# Altium PCB crossBarAdDaPCB1.PcbDoc (part 2 of 2)
Units mm, origin at the board's own origin, x right, y up, seen from the top; angles counter-clockwise.
Board outline 152.4 x 111.9 mm, 6 copper layers (Top Layer, Mid-Layer 1, Internal Plane 1, Internal Plane 2, Mid-Layer 2, Bottom Layer); 114 components, 142 nets, 664 pads, 264 vias.
Unrouted connection lines stored in the file: 16.
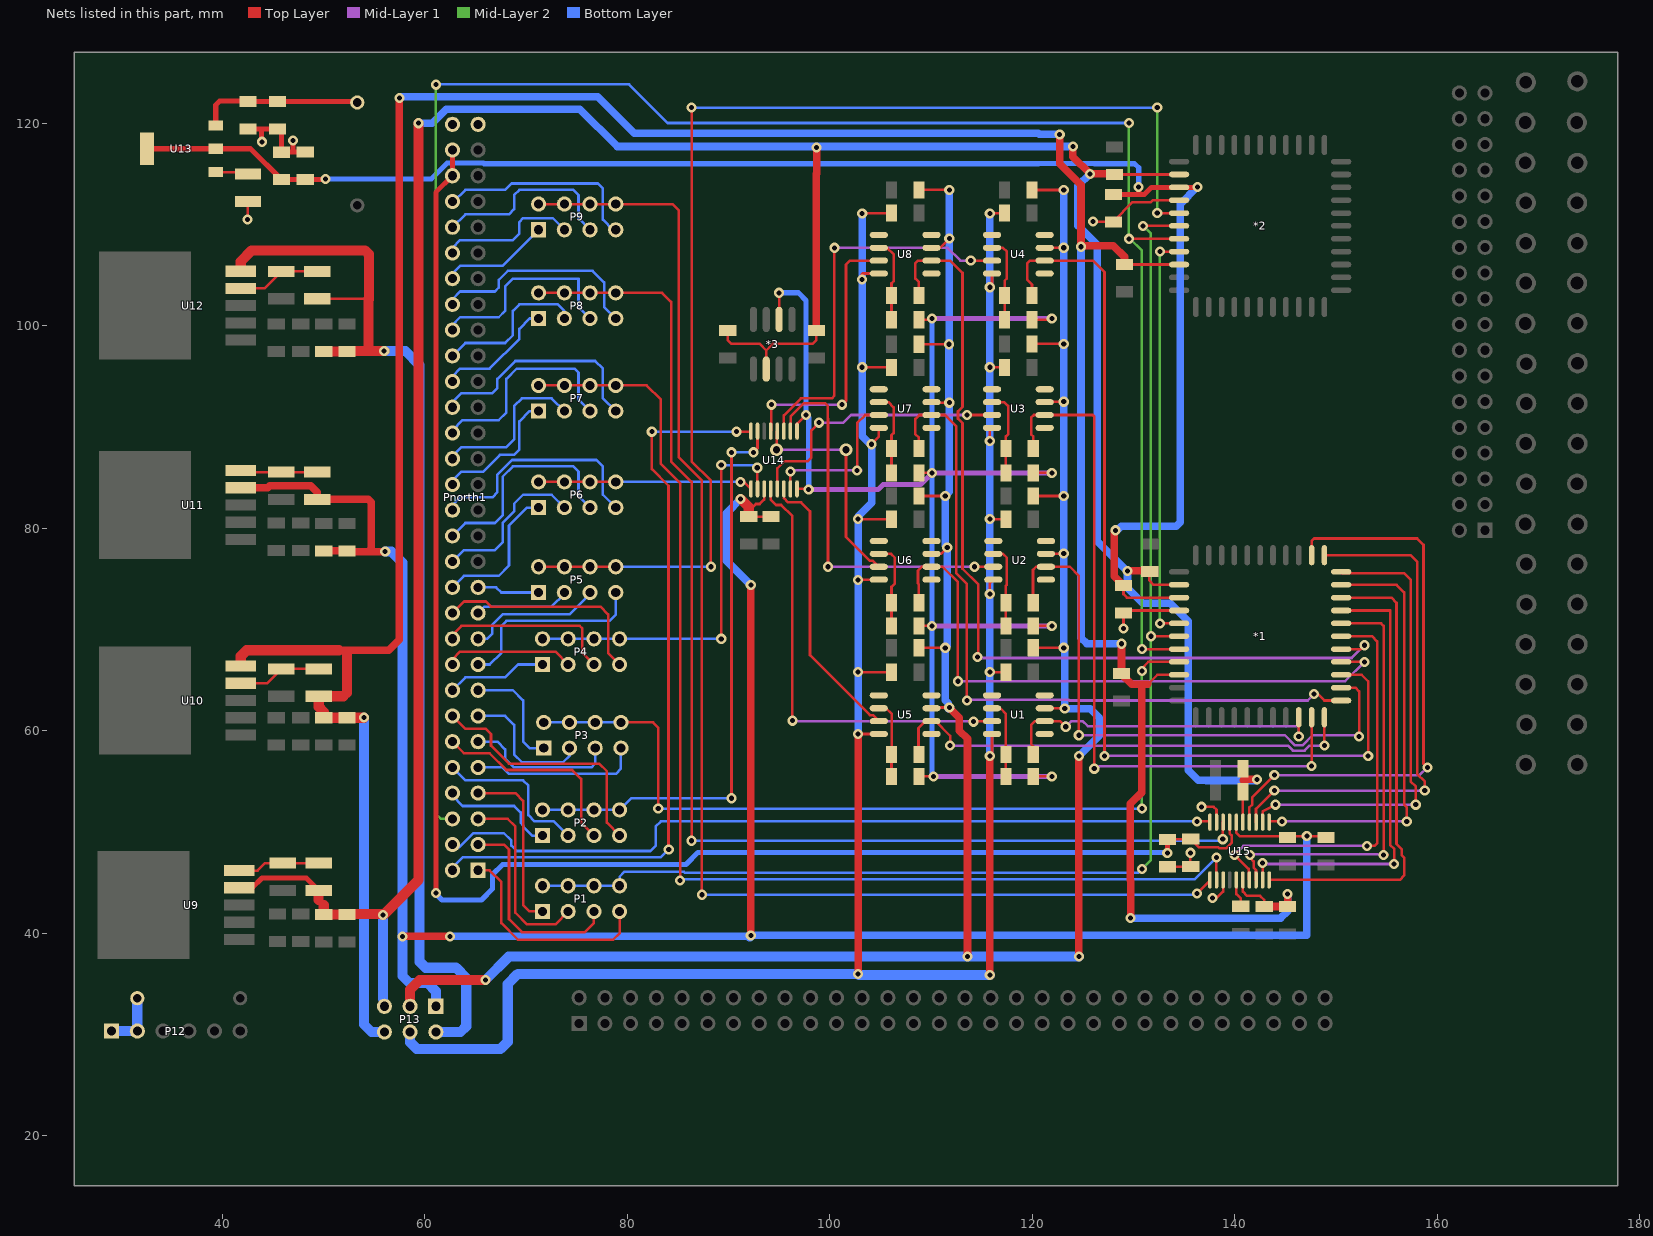
[diagram p6: the nets of this part, all layers, seen from the top]

## Via types
v1: diameter 1, hole 0.5, Top Layer to Bottom Layer, 262 vias
v2: diameter 1.27, hole 0.711, Top Layer to Bottom Layer, 2 vias

## Nets (pads, with @x,y where several pads share a name; then routed paths per layer and width w, separated by ;. In a path a pad name is that pad's centre, name@x,y a point inside that pad or via, vN(x,y) a via of type N, cw(c..) or ccw(c..) an arc to the next point about the centre after c; other vN are vias at no path point) (continued)
GND: *1.43 *2.43 C29.1 C30.1 C45.1 C46.1 C51.2 C52.2 C53.2 C54.2 Pnorth1.59 Pnorth1.60 R27.1 U15.3 U15.19 | length 38
  Top Layer w0.254: v1(42.5,110.5) 42.545,110.545 R27.1@42.545,112.268 ; C51.2@45.466,119.427 C51.2@45.847,119.046 ; C53.2@45.847,117.127 C53.2@45.87,117.15 ; v1(126,110.3) 125.7,110.3 125.75,110.25 C29.1@128,110.25 128,110.3 129.9,112.2 131.7,112.2 131.895,112.395 *2.43@134.494,112.395 ; v1(129,70.1) C30.1@129,71.65 129.232,71.882 *1.43@134.494,71.882 ; C46.1@133.35,46.576 135.603,46.576 135.603,47.948 v1(135.611,47.955) ; v1(136.7,52.5) 137.9,52.5 138.187,52.213 U15.19@138.187,50.983 ; v1(137.8,43.5) 138.2,43.5 138.837,44.137 U15.3@138.837,45.283
  Top Layer w0.508: C52.2@42.545,119.427 43.9,119.427 ; v1@43.9,118.186 43.9,119.427 ; C51.2@45.466,119.427 43.9,119.427 ; C53.2@45.847,117.127 C51.2@45.847,119.046 ; C53.2@45.87,117.15 47,117.15 ; v1(47,118.3) 47,117.15 ; C54.2@48.2,117.15 47,117.15
  other v1: 43.917,118.161
Net*1_15: *1.15 R1.2 U1.6 | length 33.2
  Top Layer w0.254: R1.2@120.095,57.658 120.095,58.467 119.888,58.674 119.888,60.579 120.269,60.96 U1.6@121.218,60.96 122.74,60.96 v1(123.3,60.4) ; v1(146.304,59.436) *1.15@146.304,61.342
  Mid-Layer 1 w0.254: v1@123.3,60.85 123.525,60.625 123.86,60.96 124.968,60.96 125.476,60.452 146.304,60.452 146.304,60.325 v1(146.304,59.436)
Net*1_16: *1.16 R5.2 U3.6 | length 70.4
  Top Layer w0.254: R5.2@120.095,87.884 120.095,89.074 119.888,89.281 119.888,90.932 120.142,91.186 U3.6@121.218,91.186 125.984,91.186 126.111,91.059 v1(126.111,56.261) ; v1(147.574,56.515) *1.16@147.574,61.342
  Mid-Layer 1 w0.254: v1(126.111,56.261) 126.357,56.507 v1@147.312,56.507
Net*1_17: *1.17 R9.2 U5.6 | length 47.8
  Top Layer w0.254: R9.2@108.792,57.658 108.761,57.689 108.761,60.276 109.445,60.96 U5.6@110.042,60.96 110.44,60.96 111.887,59.513 v1(111.887,58.547) ; v1(148.844,58.547) *1.17@148.844,61.342
  Mid-Layer 1 w0.254: v1(111.887,58.547) 145.229,58.547 145.729,58.047 146.879,58.047 147.379,58.547 v1(148.844,58.547)
Net*1_18: *1.18 R13.2 U7.6 | length 72.8
  Top Layer w0.254: R13.2@108.792,87.884 108.792,88.947 108.458,89.281 108.458,90.805 108.839,91.186 U7.6@110.042,91.186 111.379,91.186 112.5,90.065 112.5,75.543 113.538,74.505 v1(113.538,62.992) ; v1(147.828,63.627) 148.209,63.627 148.844,62.992 *1.18@150.494,62.992
  Mid-Layer 1 w0.254: v1(113.538,62.992) 113.627,63.081 123.565,63.081 123.654,62.992 147.193,62.992 v1(147.828,63.627)
Net*1_19: *1.19 R2.2 U2.6 | length 59
  Top Layer w0.254: R2.2@120.095,72.644 120.064,72.675 120.064,75.897 120.367,76.2 U2.6@121.345,76.2 123.698,76.2 124.587,75.311 v1(124.587,59.563) ; *1.19@150.494,64.262 151.892,64.262 152.273,63.881 v1(152.273,59.436)
  Mid-Layer 1 w0.254: v1(124.587,59.563) 144.931,59.563 145.939,58.555 146.669,58.555 147.677,59.563 152.146,59.563 v1(152.273,59.436)
Net*1_20: *1.20 R6.2 U4.6 | length 95.6
  Top Layer w0.254: R6.2@119.968,102.997 119.968,104.06 119.507,104.521 119.507,106.172 119.761,106.426 U4.6@121.218,106.426 125.984,106.426 127.127,105.283 v1(127.127,57.531) ; *1.20@150.494,65.532 152.527,65.532 153.162,64.897 v1(153.162,57.531)
  Mid-Layer 1 w0.254: v1(127.127,57.531) v1(153.162,57.531)
Net*1_21: *1.21 R10.2 U6.6 | length 60.9
  Top Layer w0.254: R10.2@108.792,72.644 108.792,74.469 108.712,74.549 108.712,75.819 109.093,76.2 U6.6@110.042,76.2 111.125,76.2 112.649,74.676 v1(112.649,64.897) ; *1.21@150.494,66.802 v1(152.781,66.802)
  Mid-Layer 1 w0.254: v1(112.649,64.897) 150.876,64.897 v1(152.781,66.802)
Net*1_22: *1.22 R14.2 U8.6 | length 88.8
  Top Layer w0.254: R14.2@108.792,102.997 108.792,104.314 108.458,104.648 108.458,106.172 108.712,106.426 U8.6@110.042,106.426 111.887,106.426 113.1,105.213 113.1,91.994 112.657,91.551 112.657,90.821 113.1,90.378 113.1,76.003 114.671,74.432 114.671,67.3 v1(114.586,67.3) ; *1.22@150.494,68.072 152.4,68.072 v1(152.781,68.453)
  Mid-Layer 1 w0.254: v1(114.586,67.3) 114.671,67.3 114.681,67.31 114.8,67.191 151.519,67.191 v1(152.781,68.453)
Net*1_23: *1.23 U15.7 | length 41.3
  Top Layer w0.254: v1(139.954,47.752) 141.348,46.358 141.348,45.372 U15.7@141.437,45.283 ; *1.23@150.494,69.342 153.527,69.342 154.043,68.826 154.043,48.887 153.797,48.641 v1(153.035,48.641)
  Mid-Layer 1 w0.254: v1(139.954,47.752) 140.843,48.641 v1(153.035,48.641)
Net*1_24: *1.24 U15.8 | length 43.2
  Top Layer w0.254: v1@141.478,47.498 141.856,47.12 141.856,46.487 142.087,46.256 U15.8@142.087,45.283 ; *1.24@150.494,70.612 154.432,70.612 154.686,70.358 154.686,48.133 155.067,47.752 v1(154.686,47.752)
  Mid-Layer 1 w0.254: v1(141.478,47.752) 141.521,47.795 154.643,47.795 v1(154.686,47.752)
Net*1_25: *1.25 U15.9 | length 46.1
  Top Layer w0.254: v1(142.723,46.965) 142.737,46.95 U15.9@142.737,45.283 ; *1.25@150.494,71.882 155.321,71.882 155.321,48.744 155.753,48.311 155.753,47.193 156.083,46.863 v1(155.702,46.863)
  Mid-Layer 1 w0.254: v1(142.723,46.965) 142.723,46.866 142.737,46.852 156.072,46.852 156.083,46.863 v1(155.702,46.863)
Net*1_26: *1.26 U15.10 | length 46.4
  Top Layer w0.254: U15.10@143.387,45.283 156.281,45.283 156.718,45.72 156.718,47.474 156.456,47.736 156.456,48.327 155.956,48.827 155.956,72.644 155.448,73.152 *1.26@150.494,73.152
Net*1_27: *1.27 U15.11 | length 42.8
  Top Layer w0.254: U15.11@143.458,51.054 v1(144.653,51.054) ; *1.27@150.494,74.422 155.956,74.422 156.718,73.66 156.718,52.705 156.972,52.451 v1(156.972,51.054)
  Mid-Layer 1 w0.254: v1(144.653,51.054) v1(156.972,51.054)
Net*1_28: *1.28 U15.12 | length 46
  Top Layer w0.254: U15.12@142.737,50.983 142.737,52.059 v1(144.018,52.705) ; *1.28@150.494,75.692 150.621,75.565 156.718,75.565 157.353,74.93 157.353,54.991 157.861,54.483 v1(157.861,52.705)
  Mid-Layer 1 w0.254: v1(144.018,52.705) v1(157.861,52.705)
Net*1_29: *1.29 U15.13 | length 51.1
  Top Layer w0.254: U15.13@142.087,50.983 142.087,52.298 v1(143.891,54.102) ; *1.29@148.844,77.342 *1.29@148.844,77.342 157.353,77.343 157.988,76.708 157.988,55.753 158.75,54.991 v1(158.75,54.102)
  Mid-Layer 1 w0.254: v1(143.891,54.102) v1(158.75,54.102)
Net*1_30: *1.30 U15.14 | length 56
  Top Layer w0.254: U15.14@141.437,50.983 141.437,52.454 141.727,52.744 141.727,53.462 v1(143.891,55.626) ; *1.30@147.574,77.342 147.574,78.74 147.828,78.994 157.988,78.994 158.623,78.359 158.623,56.769 v1(159.004,56.388)
  Mid-Layer 1 w0.254: v1(143.891,55.626) 158.242,55.626 v1(159.004,56.388)
Net*1_44: *1.44 *2.3 | length 40.5
  Top Layer w0.254: v1(132.588,70.612) *1.44@134.494,70.612 ; v1(132.588,107.315) *2.3@134.494,107.315
  Mid-Layer 2 w0.254: v1(132.588,70.612) v1(132.588,107.315)
NetC51_1: C51.1 C52.1 R26.1 U13.3 | length 16.2
  Top Layer w0.254: C52.1@42.498,122.174 C52.1@42.545,122.127 ; R26.1@53.26,122.127 R26.1@53.34,122.047
  Top Layer w0.508: U13.3@39.37,119.775 39.37,121.793 39.751,122.174 C52.1@42.498,122.174 ; C52.1@42.545,122.127 C51.1@45.466,122.127 R26.1@53.26,122.127
NetC55_1: C55.1 U15.5 | length 2.8
  Top Layer w0.254: U15.5@140.137,45.283 140.137,43.886 140.589,43.434 C55.1@140.589,42.672
NetP1_1: P1.1 Pnorth1.7 | length 17.2
  Top Layer w0.254: Pnorth1.7@65.278,53.848 68.961,53.848 69.723,53.086 69.723,42.799 70.358,42.164 P1.1@71.628,42.164
NetP1_3: P1.3 Pnorth1.5 | length 18.7
  Top Layer w0.254: Pnorth1.5@65.278,51.308 68.199,51.308 68.961,50.546 68.961,42.037 70.104,40.894 72.898,40.894 P1.3@74.168,42.164
NetP1_5: P1.5 Pnorth1.3 | length 20.5
  Top Layer w0.254: Pnorth1.3@65.278,48.768 67.818,48.768 68.326,48.26 68.326,41.402 69.596,40.132 75.819,40.132 76.708,41.021 P1.5@76.708,42.164
NetP1_7: P1.7 Pnorth1.1 | length 21.6
  Top Layer w0.254: Pnorth1.1@65.278,46.228 66.421,46.228 67.564,45.085 67.564,41.021 69.215,39.37 78.613,39.37 79.248,40.005 P1.7@79.248,42.164
NetP2_1: P2.1 Pnorth1.8 | length 11.4
  Bottom Layer w0.254: Pnorth1.8@62.738,53.848 62.738,53.594 63.754,52.578 68.834,52.578 69.469,51.943 69.469,50.927 69.723,50.673 69.723,50.546 70.612,49.657 P2.1@71.628,49.657
NetP2_2: P2.2 P2.4 P2.6 P2.8 U14.15 | length 57.7
  Top Layer w0.254: v1(90.297,53.34) v1(90.297,87.503) ; v1(92.456,87.503) 92.863,87.91 U14.15@92.863,89.591
  Bottom Layer w0.254: P2.2@71.628,52.197 P2.4@74.168,52.197 P2.6@76.708,52.197 P2.8@79.248,52.197 80.391,53.34 v1(90.297,53.34) ; v1(90.297,87.503) v1(92.456,87.503)
NetP2_3: P2.3 Pnorth1.10 | length 15.9
  Bottom Layer w0.254: Pnorth1.10@62.738,56.388 64.008,55.118 69.723,55.118 70.231,54.61 70.231,51.689 70.854,51.066 72.759,51.066 P2.3@74.168,49.657
NetP2_5: P2.5 Pnorth1.12 | length 20.3
  Top Layer w0.254: Pnorth1.12@62.738,58.928 63.881,57.785 66.421,57.785 68.072,56.134 74.549,56.134 75.438,55.245 75.438,50.927 P2.5@76.708,49.657
NetP2_7: P2.7 Pnorth1.14 | length 25
  Top Layer w0.254: Pnorth1.14@62.738,61.468 64.008,60.198 66.04,60.198 66.548,59.69 66.548,58.547 68.326,56.769 77.216,56.769 77.978,56.007 77.978,50.927 P2.7@79.248,49.657
NetP3_1: P3.1 Pnorth1.15 | length 11.2
  Bottom Layer w0.254: Pnorth1.15@65.278,64.008 68.707,64.008 69.723,62.992 69.723,58.928 70.358,58.293 P3.1@71.755,58.293
NetP3_3: P3.3 Pnorth1.13 | length 13.6
  Bottom Layer w0.254: Pnorth1.13@65.278,61.468 67.945,61.468 68.834,60.579 68.834,57.658 69.596,56.896 73.66,56.896 74.295,57.531 P3.3@74.295,58.293
NetP3_5: P3.5 Pnorth1.11 | length 14.8
  Bottom Layer w0.254: Pnorth1.11@65.278,58.928 67.183,58.928 67.945,58.166 67.945,57.277 68.834,56.388 76.454,56.388 76.835,56.769 P3.5@76.835,58.293
NetP3_7: P3.7 Pnorth1.9 | length 16.6
  Bottom Layer w0.254: Pnorth1.9@65.278,56.388 67.691,56.388 68.326,55.753 78.867,55.753 79.375,56.261 P3.7@79.375,58.293
NetP4_1: P4.1 Pnorth1.16 | length 9.9
  Bottom Layer w0.254: Pnorth1.16@62.738,64.008 64.008,65.278 67.945,65.278 69.215,66.548 P4.1@71.628,66.548
NetP4_2: P4.2 P4.4 P4.6 P4.8 U14.2 | length 40.6
  Top Layer w0.254: v1(89.281,69.088) v1(89.281,86.233) ; v1(92.837,85.979) 92.837,83.917 U14.2@92.863,83.891
  Bottom Layer w0.254: P4.2@71.628,69.088 P4.4@74.168,69.088 P4.6@76.708,69.088 P4.8@79.248,69.088 v1(89.281,69.088) ; v1(89.281,86.233) 92.583,86.233 v1(92.837,85.979)
NetP4_3: P4.3 Pnorth1.18 | length 12.8
  Top Layer w0.254: Pnorth1.18@62.738,66.548 62.738,67.056 63.5,67.818 72.898,67.818 P4.3@74.168,66.548
NetP4_5: P4.5 Pnorth1.20 | length 17.7
  Top Layer w0.254: Pnorth1.20@62.738,69.088 62.738,69.469 63.627,70.358 75.311,70.358 75.565,70.104 75.565,67.691 P4.5@76.708,66.548
NetP4_7: P4.7 Pnorth1.22 | length 21.8
  Top Layer w0.254: Pnorth1.22@62.738,71.628 63.881,72.771 66.04,72.771 66.548,72.263 77.343,72.263 78.105,71.501 78.105,67.691 P4.7@79.248,66.548
NetP5_1: P5.1 Pnorth1.23 | length 6.2
  Bottom Layer w0.254: Pnorth1.23@65.278,74.168 67.056,74.168 67.564,73.66 P5.1@71.247,73.66
NetP5_3: P5.3 Pnorth1.21 | length 9.4
  Bottom Layer w0.254: Pnorth1.21@65.278,71.628 65.913,72.263 72.517,72.263 73.787,73.533 P5.3@73.787,73.66
NetP5_5: P5.5 Pnorth1.19 | length 13.5
  Bottom Layer w0.254: Pnorth1.19@65.278,69.088 66.167,69.088 66.675,69.596 66.675,70.485 67.691,71.501 74.295,71.501 76.327,73.533 P5.5@76.327,73.66
NetP5_7: P5.7 Pnorth1.17 | length 19.4
  Bottom Layer w0.254: Pnorth1.17@65.278,66.548 66.421,66.548 67.564,67.691 67.564,70.358 68.072,70.866 78.232,70.866 78.867,71.501 P5.7@78.867,73.66
NetP6_1: P6.1 Pnorth1.24 | length 14.1
  Bottom Layer w0.254: Pnorth1.24@62.738,74.168 63.881,75.311 67.31,75.311 68.326,76.327 68.326,80.264 70.104,82.042 P6.1@71.247,82.042
NetP6_2: P6.2 P6.4 P6.6 P6.8 U14.1 | length 21.5
  Top Layer w0.254: P6.2@71.247,84.582 P6.4@73.787,84.582 P6.6@76.327,84.582 P6.8@78.867,84.582 ; v1(91.186,84.582) 91.44,84.836 91.44,84.664 U14.1@92.157,83.947
  Bottom Layer w0.254: P6.8@78.867,84.582 v1(91.186,84.582)
NetP6_3: P6.3 Pnorth1.26 | length 15.9
  Bottom Layer w0.254: Pnorth1.26@62.738,76.708 63.881,77.851 66.929,77.851 67.691,78.613 67.691,80.518 68.834,81.661 68.834,82.423 69.723,83.312 72.517,83.312 P6.3@73.787,82.042
NetP6_5: P6.5 Pnorth1.28 | length 21.8
  Bottom Layer w0.254: Pnorth1.28@62.738,79.248 64.008,80.518 66.929,80.518 67.691,81.28 67.691,85.09 68.707,86.106 74.676,86.106 75.184,85.598 75.184,83.185 P6.5@76.327,82.042
NetP6_7: P6.7 Pnorth1.30 | length 23.1
  Bottom Layer w0.254: Pnorth1.30@62.738,81.788 62.738,82.296 63.5,83.058 66.675,83.058 67.183,83.566 67.183,85.3 68.624,86.741 76.962,86.741 77.597,86.106 77.597,83.312 P6.7@78.867,82.042
NetP7_1: P7.1 Pnorth1.32 | length 13
  Bottom Layer w0.254: Pnorth1.32@62.738,84.709 63.627,85.598 65.786,85.598 67.437,87.249 68.834,87.249 69.342,87.757 69.342,90.551 70.358,91.567 P7.1@71.247,91.567
NetP7_2: P7.2 P7.4 P7.6 P7.8 U15.2 | length 117.1
  Top Layer w0.254: P7.2@71.247,94.107 P7.4@73.787,94.107 P7.6@76.327,94.107 P7.8@78.867,94.107 81.915,94.107 83.312,92.71 83.312,86.36 85.217,84.455 v1(85.217,45.212) ; v1(138.176,47.498) 138.176,45.294 U15.2@138.187,45.283
  Bottom Layer w0.254: v1(85.217,45.212) 85.344,45.339 136.017,45.339 v1(138.176,47.498)
NetP7_3: P7.3 Pnorth1.34 | length 15.9
  Bottom Layer w0.254: Pnorth1.34@62.738,87.122 63.627,88.011 68.072,88.011 68.834,88.773 68.834,92.075 69.596,92.837 72.517,92.837 P7.3@73.787,91.567
NetP7_5: P7.5 Pnorth1.36 | length 21.6
  Bottom Layer w0.254: Pnorth1.36@62.738,89.408 62.738,89.662 63.754,90.678 67.31,90.678 68.072,91.44 68.072,94.742 69.088,95.758 74.803,95.758 75.184,95.377 75.184,92.71 P7.5@76.327,91.567
NetP7_7: P7.7 Pnorth1.38 | length 22.6
  Bottom Layer w0.254: Pnorth1.38@62.738,91.948 62.738,92.456 63.627,93.345 66.675,93.345 67.183,93.853 67.183,94.742 68.961,96.52 76.835,96.52 77.597,95.758 77.597,92.837 P7.7@78.867,91.567
NetP8_1: P8.1 Pnorth1.40 | length 12
  Bottom Layer w0.254: Pnorth1.40@62.738,94.488 62.738,94.996 63.5,95.758 66.421,95.758 69.342,98.679 69.342,99.695 70.358,100.711 P8.1@71.247,100.711
NetP8_2: P8.2 P8.4 P8.6 P8.8 U15.18 | length 122
  Top Layer w0.254: P8.2@71.247,103.251 P8.4@73.787,103.251 P8.6@76.327,103.251 P8.8@78.867,103.251 83.439,103.251 84.328,102.362 84.328,86.614 86.36,84.582 v1(86.36,49.149) ; v1(138.8,49.3) 138.811,49.289 138.811,50.957 U15.18@138.837,50.983
  Bottom Layer w0.254: v1(86.36,49.149) 138.951,49.149 v1(138.8,49.3)
NetP8_3: P8.3 Pnorth1.42 | length 15.6
  Bottom Layer w0.254: Pnorth1.42@62.738,97.028 64.008,98.298 67.945,98.298 68.707,99.06 68.707,101.473 69.342,102.108 73.152,102.108 73.787,101.473 P8.3@73.787,100.711
NetP8_5: P8.5 Pnorth1.44 | length 20.2
  Bottom Layer w0.254: Pnorth1.44@62.738,100.076 63.5,100.838 67.31,100.838 67.945,101.473 67.945,103.886 68.707,104.648 75.184,104.648 75.184,101.854 P8.5@76.327,100.711
NetP8_7: P8.7 Pnorth1.46 | length 21.6
  Bottom Layer w0.254: Pnorth1.46@62.738,102.108 62.738,102.616 63.5,103.378 66.929,103.378 67.31,103.759 67.31,104.521 68.199,105.41 76.581,105.41 77.724,104.267 77.724,101.854 P8.7@78.867,100.711
NetP9_1: P9.1 Pnorth1.48 | length 10.8
  Bottom Layer w0.254: Pnorth1.48@62.738,104.648 62.738,105.156 63.5,105.918 67.691,105.918 P9.1@71.247,109.474
NetP9_2: P9.2 P9.4 P9.6 P9.8 U15.1 | length 133.4
  Top Layer w0.254: P9.2@71.247,112.014 P9.4@73.787,112.014 P9.6@76.327,112.014 P9.8@78.867,112.014 84.455,112.014 85.09,111.379 85.09,86.995 87.376,84.709 v1(87.376,43.815) ; v1(136.271,43.942) 137.537,45.208 U15.1@137.537,45.283
  Bottom Layer w0.254: v1(87.376,43.815) 136.144,43.815 v1(136.271,43.942)
NetP9_3: P9.3 Pnorth1.50 | length 13.9
  Bottom Layer w0.254: Pnorth1.50@62.738,107.188 62.738,107.696 63.5,108.458 68.707,108.458 69.342,109.093 69.342,110.236 69.723,110.617 72.644,110.617 P9.3@73.787,109.474
NetP9_5: P9.5 Pnorth1.52 | length 18.9
  Bottom Layer w0.254: Pnorth1.52@62.738,109.728 64.008,110.998 68.326,110.998 68.834,111.506 68.834,112.903 69.342,113.411 74.676,113.411 75.184,112.903 75.184,110.617 P9.5@76.327,109.474
NetP9_7: P9.7 Pnorth1.54 | length 20.5
  Bottom Layer w0.254: Pnorth1.54@62.738,112.268 62.865,112.268 64.008,113.411 67.945,113.411 68.58,114.046 77.089,114.046 77.597,113.538 77.597,110.49 78.613,109.474 P9.7@78.867,109.474
NetPnorth1_2: Pnorth1.2 U14.16 | length 73.8
  Top Layer w0.254: v1(82.423,89.535) 82.423,85.852 84.074,84.201 v1@84.074,48.274 ; v1(90.805,89.535) 92.157,89.535 U14.16@92.213,89.591
  Bottom Layer w0.254: Pnorth1.2@62.738,46.482 63.754,47.498 83.3,47.498 ; v1(82.423,89.535) v1(90.805,89.535) ; 83.299,47.499 v1@84.074,48.274
  other v1: 84.1,48.3
NetPnorth1_4: Pnorth1.4 U15.20 | length 78.8
  Top Layer w0.254: v1(136.271,51.054) 137.466,51.054 U15.20@137.537,50.983
  Bottom Layer w0.254: Pnorth1.4@62.738,48.768 62.992,48.514 63.425,48.514 64.81,49.899 67.806,49.899 68.556,49.149 68.556,48.665 69.088,48.133 82.296,48.133 82.804,48.641 82.804,50.546 83.312,51.054 v1(136.271,51.054)
NetR1_1: R1.1 R3.2 U1.2 | length 7.8
  Top Layer w0.254: U1.2@116.018,62.23 116.84,62.23 117.395,61.675 R1.1@117.395,57.658 R3.2@117.395,55.499
NetR2_1: R2.1 R4.2 U2.2 | length 8.3
  Top Layer w0.254: U2.2@116.145,77.47 117.094,77.47 117.475,77.089 117.475,74.422 117.395,74.342 R2.1@117.395,72.644 R4.2@117.395,70.358
NetR5_1: R5.1 R7.2 U3.2 | length 8.4
  Top Layer w0.254: U3.2@116.018,92.456 117.221,92.456 117.602,92.075 117.602,89.281 117.395,89.074 R5.1@117.395,87.884 R7.2@117.395,85.471
NetR6_1: R6.1 R8.2 U4.2 | length 8.4
  Top Layer w0.254: U4.2@116.018,107.696 117.094,107.696 117.475,107.315 117.475,104.648 117.268,104.441 R6.1@117.268,102.997 R8.2@117.268,100.584
NetR9_1: R9.1 R11.2 U5.2 | length 7.7
  Top Layer w0.254: U5.2@104.842,62.23 105.566,62.23 106.123,61.673 106.123,57.689 R9.1@106.092,57.658 R11.2@106.092,55.499
NetR10_1: R10.1 R12.2 U6.2 | length 8.6
  Top Layer w0.254: U6.2@104.842,77.47 106.045,77.47 106.426,77.089 106.426,74.549 106.092,74.215 R10.1@106.092,72.644 R12.2@106.092,70.358
NetR13_1: R13.1 R15.2 U7.2 | length 8.2
  Top Layer w0.254: U7.2@104.842,92.456 105.791,92.456 106.299,91.948 106.299,89.408 106.092,89.201 R13.1@106.092,87.884 R15.2@106.092,85.471
NetR14_1: R14.1 R16.2 U8.2 | length 8.3
  Top Layer w0.254: U8.2@104.842,107.696 105.664,107.696 106.299,107.061 106.299,104.394 106.092,104.187 R14.1@106.092,102.997 R16.2@106.092,100.584
NetR17_1: R17.1 R18.2 U9.5 | length 8.2
  Top Layer w0.254: U9.5@41.683,46.199 43.499,46.199 44.243,46.943 R18.2@45.974,46.943 R17.1@49.53,46.943
NetR20_1: R20.1 R21.2 U10.4 | length 8.3
  Top Layer w0.254: U10.4@41.835,64.692 44.419,64.692 R21.2@45.847,66.12 R20.1@49.53,66.12
NetR22_1: R22.1 R23.2 U11.5 | length 7.6
  Top Layer w0.254: U11.5@41.835,85.696 41.98,85.551 R23.2@45.847,85.551 R22.1@49.403,85.551
NetR24_1: R24.1 R25.2 U12.4 | length 8.3
  Top Layer w0.254: U12.4@41.835,103.681 44.165,103.681 R25.2@45.847,105.363 R24.1@49.403,105.363
NetR27_2: R27.2 U13.1 | length 3.3
  Top Layer w0.254: U13.1@39.37,115.175 42.338,115.175 R27.2@42.545,114.968
NetU1_1: U1.1 U1.5 U1.8
NetU1_3: U1.3 U14.4 | length 44.7
  Top Layer w0.254: U14.4@94.163,83.891 94.163,82.837 94.7,82.3 95.2,82.3 96.3,81.2 v1@96.3,60.96 ; v1(114.2,60.9) 113.852,60.9 113.792,60.96 U1.3@116.018,60.96
  Mid-Layer 1 w0.254: v1@96.3,60.96 v1@114.2,60.96
  other v1: 96.3,61
NetU2_1: U2.1 U2.5 U2.8
NetU2_3: U2.3 U14.10 | length 38.7
  Top Layer w0.254: U14.10@96.113,89.591 96.139,89.617 96.139,91.059 97.409,92.329 99.568,92.329 99.814,92.083 99.814,90.059 ; v1(99.822,76.2) 99.822,90.805 ; v1(114.3,76.2) U2.3@116.145,76.2
  Mid-Layer 1 w0.254: v1(99.822,76.2) v1(114.3,76.2)
NetU3_1: U3.1 U3.5 U3.8
NetU3_3: U3.3 U14.5 | length 27
  Top Layer w0.254: U14.5@94.813,83.891 94.813,85.923 95.504,86.614 97.79,86.614 98.171,86.995 98.171,89.662 v1(98.933,90.424) ; v1(113.538,91.186) U3.3@116.018,91.186
  Mid-Layer 1 w0.254: v1(98.933,90.424) 101.346,90.424 102.108,91.186 v1(113.538,91.186)
NetU4_1: U4.1 U4.5 U4.8
NetU4_3: U4.3 U14.11 | length 38
  Top Layer w0.254: U14.11@95.463,89.591 95.463,91.145 97.155,92.837 100.203,92.837 100.457,93.091 v1(100.457,107.696) ; v1(113.919,106.426) U4.3@116.018,106.426
  Mid-Layer 1 w0.254: v1(100.457,107.696) 111.633,107.696 112.903,106.426 v1(113.919,106.426)
NetU5_1: U5.1 U5.5 U5.8
NetU5_3: U5.3 U14.6 | length 26.8
  Top Layer w0.254: 95.468,82.967 95.885,82.55 97.155,82.55 98.044,81.661 98.044,67.465 103.96,61.549 104.253,61.549 U5.3@104.842,60.96
NetU6_1: U6.1 U6.5 U6.8
NetU6_3: U6.3 U14.12 | length 21.7
  Top Layer w0.254: v2(94.742,87.757) U14.12@94.742,89.52 ; v2(101.6,87.757) 101.6,79.149 103.96,76.789 104.253,76.789 U6.3@104.842,76.2
  Mid-Layer 1 w0.254: v2(94.742,87.757) v2(101.6,87.757)
NetU7_1: U7.1 U7.5 U7.8
NetU7_3: U7.3 U14.7 | length 16.7
  Top Layer w0.254: v1@96.019,85.718 v1(96.113,85.624) U14.7@96.113,83.891 ; v1(102.7,85.7) 102.7,90.381 103.505,91.186 U7.3@104.842,91.186
  Mid-Layer 1 w0.254: v1(96.113,85.624) 96.012,85.725 103.124,85.725 103.099,85.7 v1(102.7,85.7)
NetU8_1: U8.1 U8.5 U8.8
NetU8_3: U8.3 U14.13 | length 26.9
  Top Layer w0.254: U14.13@94.234,89.662 v1(94.234,92.202) ; v1(101.219,92.202) 101.6,92.583 101.6,106.045 101.981,106.426 U8.3@104.842,106.426
  Mid-Layer 1 w0.254: v1(94.234,92.202) v1(101.219,92.202)
PCKL_XBAR: *1.1 *2.1 P1.2 P1.4 P1.6 P1.8 | length 131
  Top Layer w0.254: v1(130.937,109.855) *2.1@134.494,109.855 ; v1(131.699,69.342) *1.1@134.494,69.342
  Mid-Layer 2 w0.254: v1(130.81,46.355) 131.699,47.244 v1(131.699,69.342) 131.699,109.093 v1(130.937,109.855)
  Bottom Layer w0.254: P1.2@71.628,44.704 P1.4@74.168,44.704 P1.6@76.708,44.704 P1.8@79.248,44.704 79.248,45.593 79.748,46.093 85.582,46.093 85.675,46 130.455,46 v1(130.81,46.355)
SCLK_XBAR: *1.2 *2.2 Pnorth1.6 | length 205.1
  Top Layer w0.254: v1(129.54,108.585) *2.2@134.494,108.585 ; v1(130.81,68.072) *1.2@134.494,68.072
  Mid-Layer 2 w0.254: v1(61.1,123.8) 61.1,51.8 61.592,51.308 Pnorth1.6@62.738,51.308 ; v1(129.54,120.015) v1(129.54,108.585) 129.667,108.585 130.81,107.442 v1(130.81,68.072)
  Bottom Layer w0.254: v1(61.1,123.8) 61.075,123.825 80.175,123.825 83.985,120.015 v1(129.54,120.015)
SDATA_FROM_XBAR: *2.44 P5.2 P5.4 P5.6 P5.8 | length 121.7
  Top Layer w0.254: P5.2@71.247,76.2 P5.4@73.787,76.2 P5.6@76.327,76.2 P5.8@78.867,76.2 ; v1(86.36,121.539) 86.36,86.614 88.265,84.709 v1(88.265,76.2) ; v1(132.334,111.125) *2.44@134.494,111.125
  Mid-Layer 2 w0.254: v1(132.334,111.125) v1(132.334,121.539)
  Bottom Layer w0.254: P5.8@78.867,76.2 v1(88.265,76.2) ; v1(86.36,121.539) v1(132.334,121.539)
SDATA_TO_XBAR: *1.3 P3.2 P3.4 P3.6 P3.8 | length 86
  Top Layer w0.254: P3.8@79.375,60.833 82.55,60.833 83.058,60.325 v1(83.058,52.324) ; v1(130.81,65.913) 130.81,66.167 131.445,66.802 *1.3@134.494,66.802
  Mid-Layer 2 w0.254: v1@130.81,51.943 v1(130.81,65.913)
  Bottom Layer w0.254: P3.2@71.755,60.833 P3.4@74.295,60.833 P3.6@76.835,60.833 P3.8@79.375,60.833 ; v1(83.058,52.324) 130.429,52.324 130.81,51.943 v1(130.81,52.324)
VA5+: C31.2 C32.2 C37.2 C38.2 C47.1 C48.1 P13.1 R22.2 U11.4 U14.3 U15.16 | length 234.7
  Top Layer w0.254: C38.2@52.324,77.771 C38.2@52.395,77.7 ; C31.2@92,81.15 C32.2@94.2,81.15 ; C31.2@92,81.7 92.7,82.4 93.078,82.4 93.513,82.835 U14.3@93.513,83.891 ; U15.16@140.137,50.983 140.137,49.929 140.466,49.6 148.883,49.6 C47.1@149,49.483
  Top Layer w0.75: U11.4@41.835,83.996 44.499,83.996 44.704,84.201 48.768,84.201 49.403,83.566 R22.2@49.403,82.851 54.436,82.851 54.737,82.55 54.737,77.978 54.483,77.724 ; C37.2@50.038,77.771 C38.2@52.324,77.771 ; C38.2@52.395,77.7 v1(56.1,77.7) ; v1(57.8,39.7) v1(62.5,39.7) ; C31.2@92,81.15 C31.2@92,81.7 ; v1(92.2,39.8) v1(92.2,74.4)
  Top Layer w1: v1(91.2,82.9) 92,82.1 C31.2@92,81.7
  Bottom Layer w0.75: v1(62.5,39.7) v1@92.1,39.7 ; v1(91.2,82.9) 89.8,81.5 89.8,76.8 v1(92.2,74.4) ; v1(92.2,39.8) 147.1,39.8 147.1,49.3 v1(147.1,49.6)
  Bottom Layer w1: v1(56.1,77.7) 56.7,77.7 57.8,76.6 v1(57.8,39.7) 57.8,35.8 58.5,35.1 60.3,35.1 61.1,34.3 P13.1@61.1,32.8 ; v1@92.1,39.7 v1(92.2,39.8)
VA5-: C43.2 C44.2 P13.2 R24.2 U12.5 | length 111.3
  Top Layer w0.254: R24.2@49.403,102.663 54.436,102.663 54.483,102.616 ; 54.193,97.5 54.483,97.79 54.436,97.837
  Top Layer w1: U12.5@41.835,105.381 41.835,106.351 42.926,107.442 54.102,107.442 54.483,107.061 54.483,102.616 ; C44.2@50.038,97.456 C43.2@52.324,97.456 52.368,97.5 54.193,97.5 v1(56,97.5) ; 54.436,97.837 54.436,102.663
  Bottom Layer w1: v1(56,97.5) 58.1,97.5 59.5,96.1 59.5,37.2 60.1,36.6 63.1,36.6 64.1,35.6 64.1,30.82 63.54,30.26 P13.2@61.1,30.26
VADRIVE+: C1.1 C2.1 C3.2 C4.2 C5.2 C6.2 C7.2 C8.2 P13.3 U1.7 U2.7 U3.7 U4.7 U5.7 U6.7 U7.7 U8.7 | length 264.5
  Top Layer w0.254: C5.2@108.792,68.199 v1(111.4,68.2) v1(111.4,68.2) ; C6.2@108.792,83.185 111.385,83.185 v1(111.4,83.2) ; C7.2@108.792,98.171 v1(111.771,98.171) ; C8.2@108.792,113.411 111.789,113.411 v1(111.8,113.4) ; U5.7@110.042,62.23 110.112,62.3 v1(111.8,62.3) ; U6.7@110.042,77.47 110.97,77.47 v1(111.6,78.1) ; U7.7@110.042,92.456 110.098,92.4 v1(111.8,92.4) ; U8.7@110.042,107.696 110.896,107.696 v1(111.8,108.6) ; C3.2@119.95,98.2 v1(123.1,98.2) ; C4.2@119.95,113.4 v1(123.1,113.4) ; C1.1@120.095,68.199 123.099,68.199 v1(123.1,68.2) ; C2.1@120.095,83.185 123.085,83.185 v1(123.1,83.2) ; U1.7@121.218,62.23 123.07,62.23 v1@123.15,62.15 ; U3.7@121.218,92.456 121.262,92.5 v1(123.1,92.5) ; U4.7@121.218,107.696 123.096,107.696 v1(123.1,107.7) ; U2.7@121.345,77.47 121.375,77.5 v1(123.1,77.5) ; v1(123.2,62.2) v1@123.15,62.15 ; v1@123.15,62.15 123.1,62.1 123.2,62.1 v1@123.15,62.15
  Top Layer w0.75: v1(111.8,62.3) 112.8,61.3 112.8,60 113.6,59.2 v1(113.6,37.7) ; v1(124.6,37.7) v1(124.6,57.5)
  Top Layer w1: P13.3@58.56,32.8 58.56,34.46 59.5,35.4 v1(66,35.4)
  Bottom Layer w0.254: v1(111.4,68.2) v1@111.6,68.4 ; v1@111.4,78.3 v1(111.6,78.1) ; v1@111.7,62.2 v1(111.8,62.3) ; v1@111.771,92.429 v1(111.8,92.4) ; v1(123.1,68.2) v1@123.2,68.1
  Bottom Layer w0.75: v1(111.4,68.2) 111.4,63 111.7,62.7 v1@111.7,62.2 ; v1@111.4,78.3 v1(111.4,83.2) 111.8,83.6 v1(111.8,92.4) ; v1@111.6,68.4 v1(111.6,78.1) ; v1@111.771,92.429 v1(111.771,98.171) ; v1@111.8,98.171 v1(111.8,108.6) v1(111.8,113.4) ; v1(123.1,68.2) v1(123.1,77.5) v1(123.1,83.2) v1(123.1,92.5) v1(123.1,98.2) v1(123.1,107.7) v1(123.1,113.4) ; v1@123.2,68.1 v1(123.2,62.2) 125.7,62.2 126.6,61.3 126.6,59.5 v1(124.6,57.5)
  Bottom Layer w1: v1(66,35.4) 68.3,37.7 v1(113.6,37.7) v1(124.6,37.7)
VADRIVE-: C13.1 C14.1 C15.1 C16.1 C17.1 C18.1 C19.1 C20.1 P13.4 U1.4 U2.4 U3.4 U4.4 U5.4 U6.4 U7.4 U8.4 | length 249.7
  Top Layer w0.254: v1(102.8,59.7) 102.81,59.69 U5.4@104.842,59.69 ; v1(102.8,65.8) 106.078,65.8 C17.1@106.092,65.786 ; v1(102.8,74.9) 104.812,74.9 U6.4@104.842,74.93 ; v1(102.8,80.9) 102.801,80.899 C18.1@106.092,80.899 ; v1(103.175,104.572) 103.175,105.075 103.256,105.156 U8.4@104.842,105.156 ; v1(103.2,95.9) 103.215,95.885 C19.1@106.092,95.885 ; v1(103.2,111.1) 106.067,111.1 C20.1@106.092,111.125 ; v1(104.1,88.3) 104.842,89.042 U7.4@104.842,89.916 ; v1(115.8,57.5) 116.018,57.718 U1.4@116.018,59.69 ; v1(115.8,65.8) 117.381,65.8 C13.1@117.395,65.786 ; v1(115.8,73.5) 115.8,74.585 U2.4@116.145,74.93 ; v1(115.8,80.9) 117.394,80.9 C14.1@117.395,80.899 ; v1(115.8,88.6) 115.8,89.698 U3.4@116.018,89.916 ; v1(115.8,95.9) 117.253,95.9 C15.1@117.268,95.885 ; v1(115.8,103.8) 116.018,104.018 U4.4@116.018,105.156 ; v1(115.8,111.1) 117.243,111.1 C16.1@117.268,111.125
  Top Layer w0.75: v1(102.8,36) v1(102.8,59.7) ; v1(115.8,35.9) v1(115.8,57.5)
  Bottom Layer w0.254: v1(102.8,36) v1@102.9,35.9 ; v1(102.8,80.9) v1@102.8,81.2 ; v1@104,88.3 v1(104.1,88.3)
  Bottom Layer w0.74: 103.2,89.1 v1@104,88.3
  Bottom Layer w0.75: v1(102.8,59.7) v1(102.8,65.8) v1(102.8,74.9) v1(102.8,80.9) ; v1@102.8,81.2 104.129,82.529 104.129,88.271 v1(104.1,88.3) ; 103.2,89.1 v1(103.2,95.9) 103.2,105.1 v1(103.2,111.1) ; v1(115.8,57.5) v1(115.8,65.8) 115.81,65.81 115.81,73.49 v1(115.8,73.5) v1(115.8,80.9) v1(115.8,88.6) v1(115.8,95.9) v1(115.8,103.8) v1(115.8,111.1)
  Bottom Layer w1: P13.4@58.56,30.26 58.56,29.24 59.2,28.6 67.5,28.6 68.2,29.3 68.2,35 69.2,36 v1(102.8,36) ; v1@102.9,35.9 v1(115.8,35.9)
VANEG: *1.4 *2.4 C23.2 C24.2 C33.1 C34.1 C49.1 C50.1 P13.6 R20.2 U10.5 U15.6 | length 307.9
  Top Layer w0.254: C23.2@50.038,61.294 50.038,61.849 ; 51.99,63.42 52.324,63.754 ; 52.07,67.945 52.324,67.691 ; v1@53.994,61.294 v1(54,61.3) ; C34.1@128.8,65.6 C34.1@128.8,65.65 ; C33.1@129.1,106.05 130.55,106.05 130.555,106.045 *2.4@134.494,106.045 ; 131.4,64.6 132.332,65.532 *1.4@134.494,65.532 ; U15.6@140.787,45.283 140.787,44.113 141.2,43.7 142.5,43.7 142.9,43.3 C49.1@142.9,42.65
  Top Layer w0.75: 51.5,67.945 52.07,67.945 56.445,67.945 57.5,69 v1(57.5,122.5) ; v1(122.7,118.9) 122.7,116 124.8,113.9 v1(124.8,107.8) 124.9,107.9 128,107.9 129.1,106.8 C33.1@129.1,106.05 ; C34.1@128.8,65.6 129.8,64.6 130.8,64.6 ; C34.1@128.8,65.65 v1(128.8,68.6) ; v1(129.7,41.5) 129.7,45.207 129.681,45.226 129.681,52.792 130.8,53.911 130.8,64.6 ; 131.4,64.6 130.8,64.6 ; C49.1@142.9,42.65 C50.1@145.2,42.65 v1(145.2,43.9)
  Top Layer w1: C24.2@52.324,61.294 v1@53.994,61.294
  Top Layer w1.016: U10.5@41.835,66.392 41.835,67.362 42.418,67.945 51.5,67.945 ; C23.2@50.038,61.294 C24.2@52.324,61.294 ; 50.038,61.849 49.53,62.357 R20.2@49.53,63.42 51.99,63.42 ; 52.324,63.754 52.324,67.691
  Bottom Layer w0.75: v1(57.5,122.5) 57.6,122.6 77.1,122.6 80.7,119 120.6,119 120.7,118.9 v1(122.7,118.9) ; v1(124.8,107.8) 124.8,69.2 125.4,68.6 v1(128.8,68.6) ; v1(129.7,41.5) 144.5,41.5 145.2,42.2 v1(145.2,43.9)
  Bottom Layer w1: v1(54,61.3) 54,31 54.74,30.26 P13.6@56.02,30.26
VAPOS: *1.41 *2.41 *3.2 C11.2 C12.2 C25.2 C26.2 C27.2 C28.2 C39.2 C40.2 P13.5 R17.2 U9.4 U15.15 | length 301.3
  Top Layer w0.254: U9.4@41.683,44.499 U9.4@42.975,44.499 ; 49.53,43.307 50.038,42.799 ; C11.2@52.324,41.863 C11.2@52.361,41.9 ; v1@55.8,41.9 v1(55.9,41.8) ; C25.2@89.916,99.521 89.916,98.584 90.3,98.2 93.1,98.2 93.726,97.574 ; *3.2@93.726,95.721 93.726,97.574 ; C26.2@98.679,99.521 98.679,98.579 98.3,98.2 94.352,98.2 93.726,97.574 ; 98.679,114.979 98.7,115 ; C27.2@128.05,115 C27.2@128.1,114.95 128.115,114.935 *2.41@134.494,114.935 ; C28.2@131.55,75.8 131.55,74.85 131.978,74.422 *1.41@134.494,74.422 ; U15.15@140.787,50.983 140.787,53.966 C39.2@140.796,53.975 C40.2@140.796,56.261
  Top Layer w0.5: U9.4@42.975,44.499 43.942,45.466 48.307,45.466 R17.2@49.53,44.243
  Top Layer w0.75: C26.2@98.679,99.521 98.679,114.979 ; 98.7,115 v1(98.7,117.6) ; v1(124,117.7) 124,116.7 v1(125.7,115) C27.2@128.05,115 ; v1(129.4,75.8) C28.2@131.55,75.8 ; 140.814,55.118 140.896,55.2 v1(142.2,55.2)
  Top Layer w1: 49.53,43.307 R17.2@49.53,44.243 ; 50.038,42.799 C12.2@50.038,41.863 C11.2@52.324,41.863 ; C11.2@52.361,41.9 v1@55.8,41.9 ; v1(55.9,41.8) 59.4,45.3 v1(59.4,120)
  Bottom Layer w0.75: v1(59.4,120) 60.723,120 62.115,121.392 75.308,121.392 79,117.7 v1(124,117.7) ; v1(125.7,115) 124.5,113.8 124.5,109.9 126.4,108 126.4,78.7 129.3,75.8 v1(129.4,75.8) 129.4,74.1 130.9,72.6 133.6,72.6 135.4,70.8 135.4,56.1 136.371,55.129 137.168,55.129 137.197,55.1 142.1,55.1 v1(142.2,55.2)
  Bottom Layer w1: P13.5@55.9,33.52 v1(55.9,41.8)
VCC: *1.42 *2.42 C29.2 C30.2 C53.1 C54.1 U13.2 U13.4 | length 164.1
  Top Layer w0.254: C54.1@48.177,114.427 C54.1@48.2,114.45 ; v1@128.1,79.7 v1(128.2,79.8) ; C30.2@129,74.35 129,73.5 129.348,73.152 *1.42@134.494,73.152 ; v1@136.265,113.665 v1(136.3,113.7)
  Top Layer w0.508: U13.4@32.57,117.475 U13.2@39.37,117.475 42.799,117.475 C53.1@45.847,114.427 C54.1@48.177,114.427 ; C54.1@48.2,114.45 50.15,114.45 v1(50.2,114.5) ; C29.2@128,112.95 131.05,112.95 131.765,113.665 *2.42@134.494,113.665 v1@136.265,113.665 ; 130.5,113.03 v1(130.5,113.7)
  Top Layer w0.75: v1@128.1,79.7 128.1,75.25 C30.2@129,74.35
  Bottom Layer w0.254: v1(128.2,79.8) v1@128.4,79.8
  Bottom Layer w0.508: v1(50.2,114.5) 60.651,114.5 62.217,116.066 65.799,116.066 65.865,116 120.6,116 120.608,116.008 126.118,116.008 126.126,116 130.1,116 130.5,115.6 v1(130.5,113.7)
  Bottom Layer w0.75: v1@128.4,79.8 128.8,80.2 134.2,80.2 134.6,80.6 134.6,112 v1(136.3,113.7)
VDIG: C45.2 C46.2 Pnorth1.56 Pnorth1.58 U15.17 | length 160.1
  Top Layer w0.254: v1(133.325,47.93) 133.27,47.93 133.2,48 v1@133.35,48.15 ; C46.2@133.35,49.276 135.603,49.276 C45.2@135.636,49.309 136.445,48.5 138.354,48.5 138.435,48.419 139.165,48.419 139.681,48.935 139.681,49.665 139.487,49.859 U15.17@139.487,50.983
  Top Layer w0.508: v1(61.1,44) 61.1,113.17 Pnorth1.56@62.738,114.808 Pnorth1.58@62.738,117.348 ; v1@133.35,48.15 C46.2@133.35,49.276
  Bottom Layer w0.254: v1@61,44 v1(61.1,44)
  Bottom Layer w0.508: v1@61,44 61.7,43.3 65.6,43.3 66.7,44.4 66.7,45.8 67.7,46.8 85.8,46.8 87,48 133.254,48 v1(133.325,47.93)
VREFDA: *3.6 R3.1 R4.1 R7.1 R8.1 R11.1 R12.1 R15.1 R16.1 U14.8 U14.9 | length 145.8
  Top Layer w0.254: *3.6@94.996,100.621 v1(94.996,103.251) ; U14.8@96.763,83.891 97.846,83.891 v1(97.917,83.82) ; U14.9@96.763,89.591 96.763,90.286 v1(97.663,91.186) ; R11.1@108.792,55.499 v1(110.236,55.499) ; R12.1@108.792,70.358 v1(110.109,70.358) ; R15.1@108.792,85.471 v1(110.109,85.471) ; R16.1@108.792,100.584 110.109,100.584 v1(110.109,100.711) ; R8.1@119.968,100.584 121.793,100.584 v1(121.92,100.711) ; R3.1@120.095,55.499 v1(121.92,55.499) ; R4.1@120.095,70.358 v1(121.92,70.358) ; R7.1@120.095,85.471 v1(121.92,85.471)
  Mid-Layer 1 w0.508: v1(97.917,83.82) 104.775,83.82 105.283,84.328 108.966,84.328 v1(110.109,85.471) v1(121.92,85.471) ; v1(110.109,70.358) v1(121.92,70.358) ; v1(110.109,100.711) v1(121.92,100.711) ; v1(110.236,55.499) v1(121.92,55.499)
  Bottom Layer w0.254: v1(97.663,91.186) v1@97.917,90.932 ; v1@110.109,55.626 v1(110.236,55.499)
  Bottom Layer w0.508: v1(94.996,103.251) 96.901,103.251 97.663,102.489 v1(97.663,91.186) ; v1(97.917,83.82) v1@97.917,90.932 ; v1@110.109,55.626 v1(110.109,70.358) v1(110.109,85.471) v1(110.109,100.711)
XGND: P12.1 P12.2 R19.2 | length 5.8
  Bottom Layer w0.254: P12.2@31.62,30.356 P12.2@31.623,30.353
  Bottom Layer w1: P12.1@29.083,30.353 P12.2@31.623,30.353 ; P12.2@31.62,30.356 R19.2@31.62,33.6
pads on no net: *1.5 *1.6 *1.39 *1.40 *2.5 *2.6 *2.39 *2.40 *3.1 *3.5 *3.7 *3.8 P10.1 P10.2 P10.4 P10.6 P10.8 P10.10 P10.12 P10.14 P10.16 P10.18 P10.20 P10.22 P10.24 P10.26 P10.28 P10.30 P10.32 P10.34 P10.35 P10.36 P12.3 P12.4 Pnorth1.25 Pnorth1.27 Pnorth1.29 Pnorth1.31 Pnorth1.33 Pnorth1.35 Pnorth1.37 Pnorth1.39 Pnorth1.41 Pnorth1.43 Pnorth1.45 Pnorth1.47 Pnorth1.49 Pnorth1.51 Pnorth1.53 Pnorth1.55 Pnorth1.57 Pwest1.2 Pwest1.4 Pwest1.6 Pwest1.8 Pwest1.10 Pwest1.12 Pwest1.14 Pwest1.16 Pwest1.18 Pwest1.20 Pwest1.22 Pwest1.24 Pwest1.26 Pwest1.28 Pwest1.30 Pwest1.32 Pwest1.33 Pwest1.34 Pwest1.35 Pwest1.36 Pwest1.37 Pwest1.38 Pwest1.39 Pwest1.40 Pwest1.41 Pwest1.42 Pwest1.43 Pwest1.44 Pwest1.45 Pwest1.46 Pwest1.47 Pwest1.48 Pwest1.49 Pwest1.50 Pwest1.51 Pwest1.52 Pwest1.53 Pwest1.54 Pwest1.55 Pwest1.56 Pwest1.57 Pwest1.58 Pwest1.59 Pwest1.60
copper on no net: | length 528.6
  Top Layer w1.2: 25.4,15.1 177.8,15.1 177.8,127 25.4,127 25.4,15.1

## Polygon pours and split planes (outlines as drawn)
AGND on Internal Plane 1 (split plane): 177.29,15.61 25.91,15.61 25.91,126.49 177.29,126.49
GND on Internal Plane 2 (split plane): 177.29,15.61 25.91,15.61 25.91,126.49 177.29,126.49

## Keep-outs
Top Layer:
  lines w0.254: 26.67,16.6 164.682,16.6 172.9,16.6 176.276,16.6 176.276,125.476 26.797,125.476 26.67,125.349 26.67,27.813 26.67,16.6

## Other copper
Top Layer:
  text "Layer Stack Up Detail for: crossBarAdDaPCB1.PcbDoc" at 30.861,123.736 h0

## Text inside footprints (layer, text, board x,y; h text height)
P1: Top Overlay "8" at 80.772,44.196 h1.27; Top Overlay "7" at 80.772,41.656 h1.27; Top Overlay "1" at 69.596,41.656 h1.27; Top Overlay "2" at 69.088,44.196 h1.27
P2: Top Overlay "8" at 80.772,51.689 h1.27; Top Overlay "7" at 80.772,49.149 h1.27; Top Overlay "1" at 69.596,49.149 h1.27; Top Overlay "2" at 69.088,51.689 h1.27
P3: Top Overlay "8" at 80.899,60.325 h1.27; Top Overlay "7" at 80.899,57.785 h1.27; Top Overlay "1" at 69.723,57.785 h1.27; Top Overlay "2" at 69.215,60.325 h1.27
P4: Top Overlay "8" at 80.772,68.58 h1.27; Top Overlay "7" at 80.772,66.04 h1.27; Top Overlay "1" at 69.596,66.04 h1.27; Top Overlay "2" at 69.088,68.58 h1.27
P5: Top Overlay "8" at 80.391,75.692 h1.27; Top Overlay "7" at 80.391,73.152 h1.27; Top Overlay "1" at 69.215,73.152 h1.27; Top Overlay "2" at 68.707,75.692 h1.27
P6: Top Overlay "8" at 80.391,84.074 h1.27; Top Overlay "7" at 80.391,81.534 h1.27; Top Overlay "1" at 69.215,81.534 h1.27; Top Overlay "2" at 68.707,84.074 h1.27
P7: Top Overlay "8" at 80.391,93.599 h1.27; Top Overlay "7" at 80.391,91.059 h1.27; Top Overlay "1" at 69.215,91.059 h1.27; Top Overlay "2" at 68.707,93.599 h1.27
P8: Top Overlay "8" at 80.391,102.743 h1.27; Top Overlay "7" at 80.391,100.203 h1.27; Top Overlay "1" at 69.215,100.203 h1.27; Top Overlay "2" at 68.707,102.743 h1.27
P9: Top Overlay "8" at 80.391,111.506 h1.27; Top Overlay "7" at 80.391,108.966 h1.27; Top Overlay "1" at 69.215,108.966 h1.27; Top Overlay "2" at 68.707,111.506 h1.27
P10: Top Overlay "2" at 162.668,76.752 h1.27 r90; Top Overlay "1" at 165.208,77.26 h1.27 r90; Top Overlay "35" at 165.208,124.504 h1.27 r90; Top Overlay "36" at 162.668,124.504 h1.27 r90
P13: Top Overlay "1" at 63.132,33.308 h1.27 r180; Top Overlay "2" at 63.64,30.768 h1.27 r180; Top Overlay "5" at 54.496,33.308 h1.27 r180; Top Overlay "6" at 54.496,30.768 h1.27 r180
Pnorth1: Top Overlay "60" at 63.246,121.92 h1.27 r90; Top Overlay "59" at 65.786,121.92 h1.27 r90; Top Overlay "1" at 65.786,43.688 h1.27 r90; Top Overlay "2" at 63.246,43.688 h1.27 r90; Bottom Overlay "1" at 65.786,-9.652 h1.27 r90
Pwest1: Top Overlay "60" at 150.945,33.135 h1.27; Top Overlay "59" at 150.945,30.595 h1.27; Top Overlay "1" at 72.713,30.595 h1.27; Top Overlay "2" at 72.713,33.135 h1.27; Bottom Overlay "1" at 19.373,30.595 h1.27